# Altium PCB vert.PcbDoc (part 1 of 2)
Units mm, origin at the board's own origin, x right, y up, seen from the top; angles counter-clockwise.
Board outline 145 x 85 mm, 2 copper layers (Top Layer, Bottom Layer); 219 components, 187 nets, 800 pads, 113 vias.
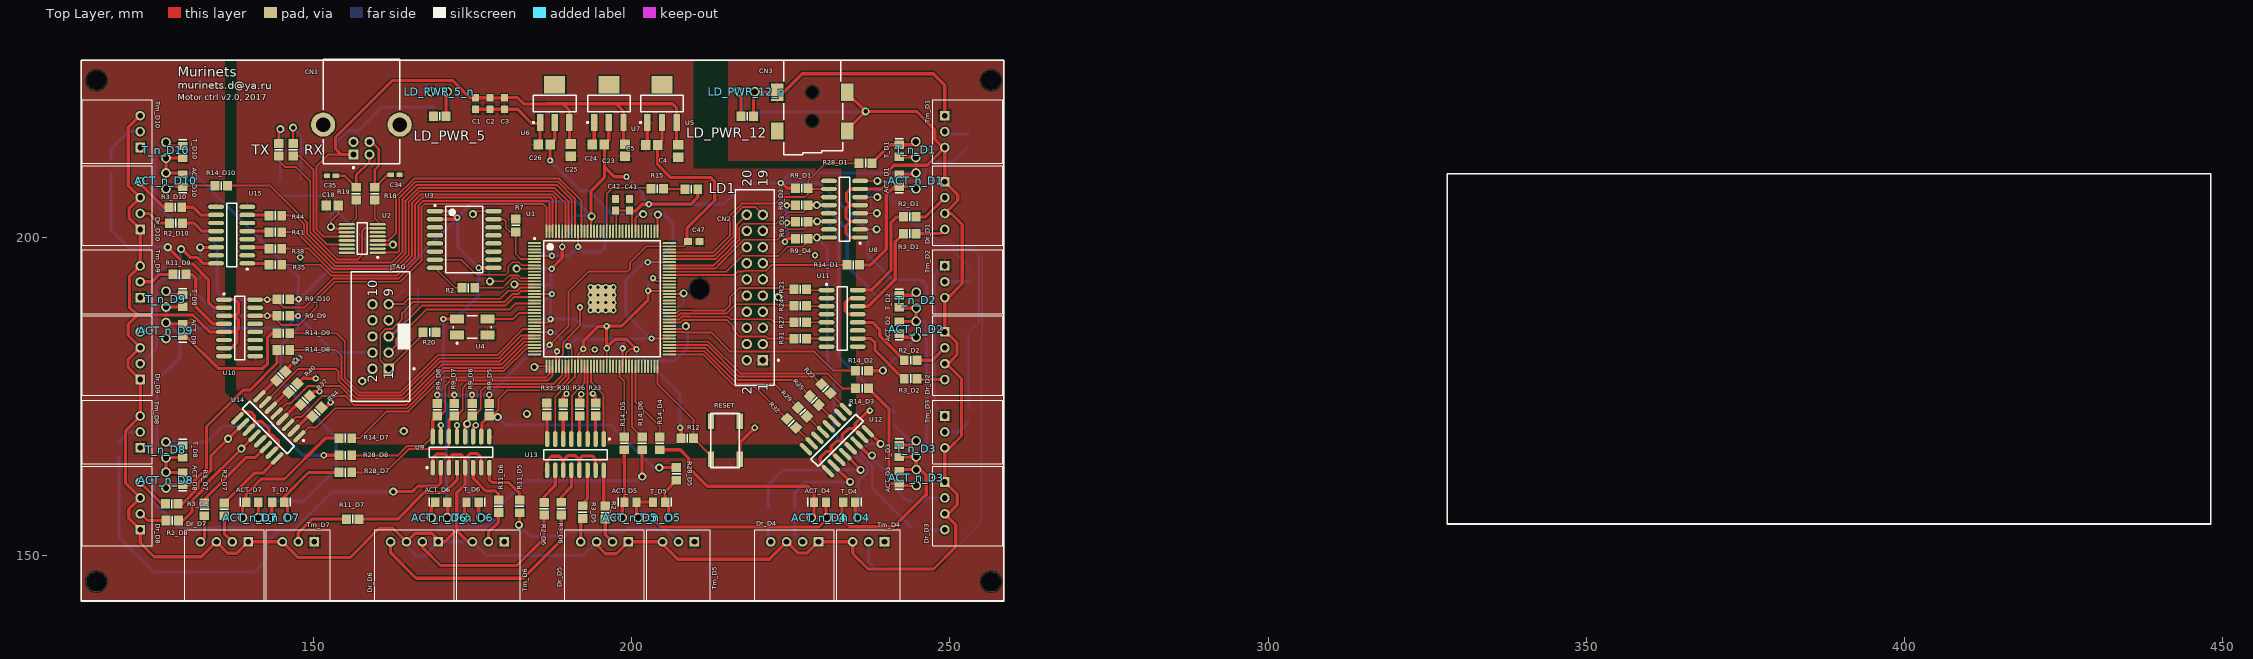
[diagram p0: Top Layer view]
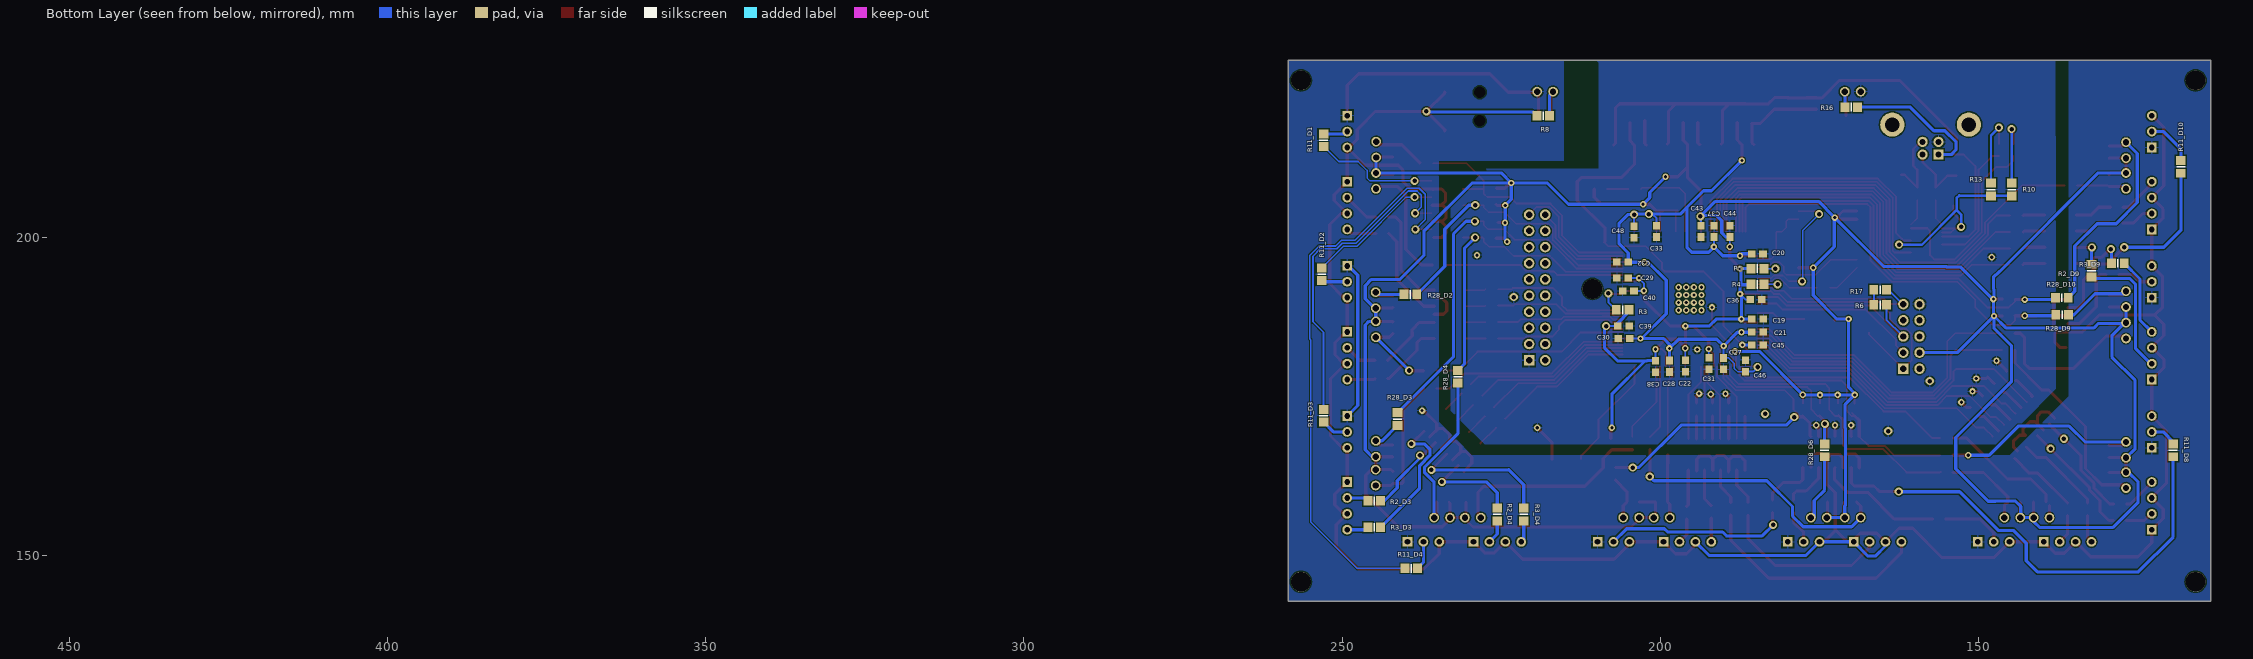
[diagram p1: Bottom Layer view, seen from below]

## Layer stack, top to bottom
Top Solder: solder mask 0.0102, Solder Resist, Dk 3.5
Top Layer: signal copper 0.0356
Dielectric 1: dielectric 0.32, FR-4, Dk 4.8
Bottom Layer: signal copper 0.0356
Bottom Solder: solder mask 0.0102, Solder Resist, Dk 3.5

## Board outline
113.475,142.9 113.475,227.9 258.475,227.9 258.475,142.9

## Design rules (kind name [scope] priority, off if disabled: settings)
Clearance [All] p1: gap=0.2 ignorepadtopadclearanceinfootprint=FALSE
DiffPairsRouting [All] p1: maxlimit=0.254 minlimit=0.254 mostfreqgap=0.254 toplayer_minwidth=0.3 toplayer_maxwidth=0.381 toplayer_prefwidth=0.381 bottomlayer_minwidth=0.3 bottomlayer_maxwidth=0.381 bottomlayer_prefwidth=0.381 maxuncoupledlength=12.7
PolygonConnect [All] p1: connectstyle=Relief reliefconductorwidth=0.254 reliefentries=4 polygonreliefangle="90 Angle" airgapwidth=0.254
RoutingVias [All] p1: holewidth=0.5 width=1 viastyle="Through Hole" minholewidth=0.5 minwidth=1 maxholewidth=0.5 maxwidth=1
SilkToSolderMaskClearance [IsPad] p1: minsilkscreentomaskgap=0 clearancetoexposedcopper=TRUE
SolderMaskExpansion [All] p1: expansion=0.102
UnRoutedNet [All] p1: checkbadconnections=TRUE
Width [All] p1: maxlimit=1 minlimit=0.2 preferedwidth=0.25 minimp=50.000000 maximp=50.000000 favimp=50.000000
27 further rules are at their usual default settings.

## Classes and differential pairs
net class step_[1..12]: step_1 step_2 step_3 step_4 step_5 step_6 step_7 step_8 step_9 step_10 step_11 step_12
net class dir_[1..12]: dir_1 dir_2 dir_3 dir_4 dir_5 dir_6 dir_7 dir_8 dir_9 dir_10 dir_12
net class term_L[1..12]: term_L1 term_L2 term_L3 term_L4 term_L5 term_L6 term_L7 term_L8 term_L9 term_L10 term_L11 term_L12
net class term_H[1..12]: term_H1 term_H2 term_H3 term_H4 term_H5 term_H6 term_H7 term_H8 term_H9 term_H10 term_H11 term_H12
net class led_dr[1..12]: LED_DR1 LED_DR2 LED_DR3 LED_DR4 LED_DR5 LED_DR6 LED_DR7 LED_DR8 LED_DR9 LED_DR10 led_dr11 led_dr12
net class DIR_H[1..12]: DIR_H1 DIR_H2 DIR_H3 DIR_H4 DIR_H5 DIR_H6 DIR_H7 DIR_H8 DIR_H9 DIR_H10
net class STEP_H[1..12]: STEP_H1 STEP_H2 STEP_H3 STEP_H4 STEP_H5 STEP_H6 STEP_H7 STEP_H8 STEP_H9 STEP_H10
channel class step-dir-single: D1 D2 D3 D4 D5 D6 D7 D8 D9 D10 D11 D12
differential pair USBD: +USBD_P -USBD_N

## Components (designator, comment, footprint, x,y, rotation, side; value= is the part's Value field where it differs from the comment)
ACT_D1 "led" CD2012-0805 242.05,208.975 r270 top (schematic designator ACT)
ACT_D2 "led" CD2012-0805 242.05,185.85 r270 top (schematic designator ACT)
ACT_D3 "led" CD2012-0805 242.05,162.325 r270 top (schematic designator ACT)
ACT_D4 "led" CD2012-0805 229.6,158.45 r180 top (schematic designator ACT)
ACT_D5 "led" CD2012-0805 199.8,158.45 r180 top (schematic designator ACT)
ACT_D6 "led" CD2012-0805 170.075,158.45 r180 top (schematic designator ACT)
ACT_D7 "led" CD2012-0805 140.35,158.45 r180 top (schematic designator ACT)
ACT_D8 "led" CD2012-0805 129.45,162.125 r270 top (schematic designator ACT)
ACT_D9 "led" CD2012-0805 129.45,185.5 r270 top (schematic designator ACT)
ACT_D10 "led" CD2012-0805 129.45,208.975 r270 top (schematic designator ACT)
ACT_n_D1 "led" led-pins 244.725,208.625 r270 top (schematic designator ACT_n)
ACT_n_D2 "led" led-pins 244.75,185.3 r270 top (schematic designator ACT_n)
ACT_n_D3 "led" led-pins 244.775,162 r270 top (schematic designator ACT_n)
ACT_n_D4 "led" led-pins 229.15,155.95 r180 top (schematic designator ACT_n)
ACT_n_D5 "led" led-pins 199.45,155.95 r180 top (schematic designator ACT_n)
ACT_n_D6 "led" led-pins 169.45,155.95 r180 top (schematic designator ACT_n)
ACT_n_D7 "led" led-pins 139.775,155.95 r180 top (schematic designator ACT_n)
ACT_n_D8 "led" led-pins 126.85,161.6 r270 top (schematic designator ACT_n)
ACT_n_D9 "led" led-pins 126.85,185.1 r270 top (schematic designator ACT_n)
ACT_n_D10 "led" led-pins 126.85,208.625 r270 top (schematic designator ACT_n)
C1 "Cap" CAPC1608M 175.475,221.075 r270 top value=10nF
C2 "Cap" CAPC1608M 177.725,221.075 r270 top value=100nF
C3 "Cap" CAPC1608M 179.975,221.075 r270 top value=4.7uF
C4 "Cap" CAPC2012M 207.3,213.625 r270 top value=10uF
C5 "Cap" CAPC2012M 203.125,214.55 r180 top value=10uF
C18 "Cap" CAPC2012M 152.95,205.05 r180 top value=100nF
C19 "Cap" CAPC1608M 184.7,187.2 r0 bottom value=100nF
C20 "Cap" CAPC1608M 184.75,197.475 r180 bottom value=100nF
C21 "Cap" CAPC1608M 184.725,185.15 r180 bottom value=100nF
C22 "Cap" CAPC1608M 196.075,179.85 r90 bottom value=100nF
C23 "Cap" CAPC2012M 198.95,213.75 r270 top value=10uF
C24 "Cap" CAPC2012M 194.75,214.625 r180 top value=10uF
C25 "Cap" CAPC2012M 190.425,213.775 r270 top value=10uF
C26 "Cap" CAPC2012M 186.225,214.625 r180 top value=10uF
C27 "Cap" CAPC1608M 190.05,180.2 r270 bottom value=100nF
C28 "Cap" CAPC1608M 198.575,179.8 r270 bottom value=100nF
C29 "Cap" CAPC1608M 205.925,193.65 r180 bottom value=100nF
C30 "Cap" CAPC1608M 205.725,184.175 r0 bottom value=100nF
C31 "Cap" CAPC1608M 192.325,180.225 r90 bottom value=100nF
C32 "Cap" CAPC1608M 205.925,196.15 r0 bottom value=100nF
C33 "Cap" CAPC1608M 200.575,201 r270 bottom value=100nF
C34 "Cap" CAPC1005M 162.8,209.875 r180 top value=47pF
C35 "Cap" CAPC1005M 152.8,209.725 r0 top value=47pF
C36 "Cap" CAPC1608M 184.95,190.25 r0 bottom value=100nF
C37 "Cap" CAPC1608M 191.575,201 r90 bottom value=100nF
C38 "Cap" CAPC1608M 200.75,179.775 r90 bottom value=100nF
C39 "Cap" CAPC1608M 205.8,186.125 r0 bottom value=100nF
C40 "Cap" CAPC1608M 205.025,191.65 r180 bottom value=100nF
C41 "Cap" CAPC1608M 199.625,205.175 r270 top value=100nF
C42 "Cap" CAPC1608M 197.425,205.175 r270 top value=100nF
C43 "Cap" CAPC1608M 193.575,201 r90 bottom value=100nF
C44 "Cap" CAPC1608M 189.075,201 r270 bottom value=100nF
C45 "Cap" CAPC1608M 184.725,183.15 r0 bottom value=100nF
C46 "Cap" CAPC1608M 186.6,179.85 r270 bottom value=100nF
C47 "Cap" CAPC1608M 209.75,199.375 r180 top value=100nF
C48 "Cap" CAPC1608M 204.1,200.9 r90 bottom value=100nF
CN1 "Conn" USB2.5-2H4D 157.52,214.065 r90 top
CN2 "idc-20" IDC2.54-V20C 219.35,192.175 r90 top
CN3 "conn_4_2.54" SCKT/SM4.5-2H4 228.375,222.85 r270 top
Dr_D1 "4-pin" CWF-4R 249.2,208.8 r270 top (schematic designator Dr)
Dr_D2 "4-pin" CWF-4R 249.2,185.2 r270 top (schematic designator Dr)
Dr_D3 "4-pin" CWF-4R 249.2,161.6 r270 top (schematic designator Dr)
Dr_D4 "4-pin" CWF-4R 229.35,152.2 r180 top (schematic designator Dr)
Dr_D5 "4-pin" CWF-4R 199.475,152.2 r180 top (schematic designator Dr)
Dr_D6 "4-pin" CWF-4R 169.6,152.2 r180 top (schematic designator Dr)
Dr_D7 "4-pin" CWF-4R 139.725,152.2 r180 top (schematic designator Dr)
Dr_D8 "4-pin" CWF-4R 122.75,154.1 r90 top (schematic designator Dr)
Dr_D9 "4-pin" CWF-4R 122.75,177.7 r90 top (schematic designator Dr)
Dr_D10 "4-pin" CWF-4R 122.75,201.3 r90 top (schematic designator Dr)
JTAG "IDC-10MS" IDC2.54-V10D 160.525,184.475 r90 top
LD1 "chip led" RESC2012M 209.375,207.625 r180 top
LD_PWR_5 "led" RESC2012M 169.825,219.1 r180 top
LD_PWR_5_n "led" led-pins 169.45,222.9 r180 top
LD_PWR_12 "led" RESC2012M 218.15,219.1 r0 top
LD_PWR_12_n "led" led-pins 218.4,223 r0 top
R2 "25" RESC2012M 174.325,192.1 r180 top value=1K
R2_D1 "1K" RESC2012M 243.7,203.275 r0 top (schematic designator R2)
R2_D2 "1K" RESC2012M 243.825,180.75 r0 top (schematic designator R2)
R2_D3 "1K" RESC2012M 244.95,158.625 r0 bottom (schematic designator R2)
R2_D4 "1K" RESC2012M 225.625,156.5 r270 bottom (schematic designator R2)
R2_D5 "1K" RESC2012M 195.85,156.8 r270 top (schematic designator R2)
R2_D6 "1K" RESC2012M 186.225,157.4 r270 top (schematic designator R2)
R2_D7 "1K" RESC2012M 135.975,157.3 r270 top (schematic designator R2)
R2_D8 "1K" RESC2012M 127.8,155.55 r180 top (schematic designator R2)
R2_D9 "1K" RESC2012M 132.225,194.825 r270 bottom (schematic designator R2)
R2_D10 "1K" RESC2012M 128.375,202.3 r180 top (schematic designator R2)
R3 "10K" RESC2012M 205.925,188.65 r0 bottom value=1K
R3_D1 "1K" RESC2012M 243.7,200.65 r0 top (schematic designator R3)
R3_D2 "1K" RESC2012M 243.825,177.85 r0 top (schematic designator R3)
R3_D3 "1K" RESC2012M 244.95,154.475 r0 bottom (schematic designator R3)
R3_D4 "1K" RESC2012M 221.45,156.5 r270 bottom (schematic designator R3)
R3_D5 "1K" RESC2012M 192.275,156.875 r270 top (schematic designator R3)
R3_D6 "1K" RESC2012M 188.925,157.425 r270 top (schematic designator R3)
R3_D7 "1K" RESC2012M 132.85,157.3 r270 top (schematic designator R3)
R3_D8 "1K" RESC2012M 127.7,158.15 r180 top (schematic designator R3)
R3_D9 "1K" RESC2012M 128.075,195.975 r180 bottom (schematic designator R3)
R3_D10 "1K" RESC2012M 128.275,204.775 r180 top (schematic designator R3)
R4 "10K" RESC2012M 184.725,192.65 r180 bottom value=1K
R5 "10K" RESC2012M 184.725,195.15 r180 bottom value=1K
R6 "10K" RESC2012M 165.45,189.425 r0 bottom value=1K
R7 "Res2" RESC2012M 181.775,201.925 r270 top value=10K
R8 "Res2" RESC2012M 218.4,219.15 r0 bottom value=1K
R9_D1 "1K" RESC2012M 226.725,207.775 r0 top (schematic designator R9)
R9_D2 "1K" RESC2012M 226.725,205.133 r0 top (schematic designator R9)
R9_D3 "1K" RESC2012M 226.725,202.492 r0 top (schematic designator R9)
R9_D4 "1K" RESC2012M 226.725,199.85 r0 top (schematic designator R9)
R9_D5 "1K" RESC2012M 177.6,172.95 r270 top (schematic designator R9)
R9_D6 "1K" RESC2012M 174.925,172.95 r270 top (schematic designator R9)
R9_D7 "1K" RESC2012M 172.075,172.95 r270 top (schematic designator R9)
R9_D8 "1K" RESC2012M 169.45,172.95 r270 top (schematic designator R9)
R9_D9 "1K" RESC2012M 145.25,187.7 r180 top (schematic designator R9)
R9_D10 "1K" RESC2012M 145.25,190.35 r180 top (schematic designator R9)
R10 "Res2" RESC2012M 144.77,207.565 r90 bottom value=1K
R11_D1 "1K" RESC2012M 252.925,215.3 r90 bottom (schematic designator R11)
R11_D2 "1K" RESC2012M 253.2,194.25 r270 bottom (schematic designator R11)
R11_D3 "1K" RESC2012M 252.925,172.025 r270 bottom (schematic designator R11)
R11_D4 "1K" RESC2012M 239.15,148.025 r180 bottom (schematic designator R11)
R11_D5 "1K" RESC2012M 182.375,157.775 r270 top (schematic designator R11)
R11_D6 "1K" RESC2012M 179.075,157.8 r270 top (schematic designator R11)
R11_D7 "1K" RESC2012M 156.15,155.775 r180 top (schematic designator R11)
R11_D8 "1K" RESC2012M 119.4,166.575 r90 bottom (schematic designator R11)
R11_D9 "1K" RESC2012M 128.925,194.225 r180 top (schematic designator R11)
R11_D10 "1K" RESC2012M 118.175,211.125 r90 bottom (schematic designator R11)
R12 "Res2" RESC2012M 208.725,168.475 r180 top value=10K
R13 "Res2" RESC2012M 148.02,207.565 r90 bottom value=1K
R14_D1 "Res2" RESC2012M 234.825,195.725 r0 top value=1K (schematic designator R14)
R14_D2 "Res2" RESC2012M 236.2,179.1 r0 top value=1K (schematic designator R14)
R14_D3 "Res2" RESC2012M 236.2,176.325 r0 top value=1K (schematic designator R14)
R14_D4 "Res2" RESC2012M 204.4,167.675 r270 top value=1K (schematic designator R14)
R14_D5 "Res2" RESC2012M 198.825,167.675 r270 top value=1K (schematic designator R14)
R14_D6 "Res2" RESC2012M 201.625,167.675 r270 top value=1K (schematic designator R14)
R14_D7 "Res2" RESC2012M 155,168.5 r180 top value=1K (schematic designator R14)
R14_D8 "Res2" RESC2012M 145.25,182.35 r180 top value=1K (schematic designator R14)
R14_D9 "Res2" RESC2012M 145.25,184.975 r180 top value=1K (schematic designator R14)
R14_D10 "Res2" RESC2012M 135.475,208.175 r180 top value=1K (schematic designator R14)
R15 "Res2" RESC2012M 204,207.675 r0 top value=270
R16 "Res2" RESC2012M 169.975,220.525 r180 bottom value=1K
R17 "1K" RESC2012M 165.45,191.8 r0 bottom
R18 "Res" RESC2012M 159.625,206.925 r90 top value=27
R19 "Res" RESC2012M 156.675,206.925 r90 top value=27
R20 "1K" RESC2012M 168.225,185.125 r0 top
R21 "Res2" RESC2012M 226.475,191.9 r0 top value=1K
R22 "Res2" RESC2012M 230.507,176.256 r315 top value=1K
R23 "Res2" RESC2012M 194.325,173 r270 top value=1K
R24 "Res2" RESC2012M 226.475,189.317 r0 top value=1K
R25 "Res2" RESC2012M 228.686,174.436 r315 top value=1K
R26 "Res2" RESC2012M 191.8,173 r270 top value=1K
R27 "Res2" RESC2012M 226.475,186.733 r0 top value=1K
R28_D1 "Res2" RESC2012M 236.75,211.725 r0 top value=1K (schematic designator R28)
R28_D2 "Res2" RESC2012M 239.275,191.075 r0 bottom value=1K (schematic designator R28)
R28_D3 "Res2" RESC2012M 241.3,171.5 r270 bottom value=1K (schematic designator R28)
R28_D4 "Res2" RESC2012M 231.8,178.15 r270 bottom value=1K (schematic designator R28)
R28_D5 "Res2" RESC2012M 207.025,162.875 r270 top value=1K (schematic designator R28)
R28_D6 "Res2" RESC2012M 174.175,166.575 r270 bottom value=1K (schematic designator R28)
R28_D7 "Res2" RESC2012M 155,163.1 r180 top value=1K (schematic designator R28)
R28_D8 "Res2" RESC2012M 155,165.8 r180 top value=1K (schematic designator R28)
R28_D9 "Res2" RESC2012M 136.85,187.875 r180 bottom value=1K (schematic designator R28)
R28_D10 "Res2" RESC2012M 136.875,190.55 r180 bottom value=1K (schematic designator R28)
R29 "Res2" RESC2012M 226.865,172.615 r315 top value=1K
R30 "Res2" RESC2012M 189.25,173 r270 top value=1K
R31 "Res2" RESC2012M 226.475,184.15 r0 top value=1K
R32 "Res2" RESC2012M 225.097,170.847 r315 top value=1K
R33 "Res2" RESC2012M 186.675,173 r270 top value=1K
R34 "Res2" RESC2012M 150.55,172.591 r225 top value=1K
R35 "Res2" RESC2012M 144,195.75 r180 top value=1K
R37 "Res2" RESC2012M 148.694,174.447 r225 top value=1K
R38 "Res2" RESC2012M 144,198.275 r180 top value=1K
R40 "Res2" RESC2012M 146.785,176.357 r225 top value=1K
R41 "Res2" RESC2012M 144,200.875 r180 top value=1K
R43 "Res2" RESC2012M 144.858,178.283 r225 top value=1K
R44 "Res2" RESC2012M 144,203.475 r180 top value=1K
RESET "LTL6" "BUTTON - LTL6" 216.925,172.375 r180 top
RX "led" RESC2012M 146.77,213.815 r90 top
T_D1 "led" CD2012-0805 242.05,213.65 r90 top (schematic designator T)
T_D2 "led" CD2012-0805 242.05,190 r90 top (schematic designator T)
T_D3 "led" CD2012-0805 242.05,166.475 r90 top (schematic designator T)
T_D4 "led" CD2012-0805 234.175,158.45 r0 top (schematic designator T)
T_D5 "led" CD2012-0805 204.3,158.45 r0 top (schematic designator T)
T_D6 "led" CD2012-0805 175,158.45 r0 top (schematic designator T)
T_D7 "led" CD2012-0805 144.45,158.45 r0 top (schematic designator T)
T_D8 "led" CD2012-0805 129.45,166.4 r90 top (schematic designator T)
T_D9 "led" CD2012-0805 129.45,190.075 r90 top (schematic designator T)
T_D10 "led" CD2012-0805 129.45,213.475 r90 top (schematic designator T)
T_n_D1 "led" led-pins 244.6,214.15 r90 top (schematic designator T_n)
T_n_D2 "led" led-pins 244.675,190.475 r90 top (schematic designator T_n)
T_n_D3 "led" led-pins 244.65,167.125 r90 top (schematic designator T_n)
T_n_D4 "led" led-pins 234.6,156.05 r0 top (schematic designator T_n)
T_n_D5 "led" led-pins 204.875,156.05 r0 top (schematic designator T_n)
T_n_D6 "led" led-pins 175.375,156.05 r0 top (schematic designator T_n)
T_n_D7 "led" led-pins 144.975,156.05 r0 top (schematic designator T_n)
T_n_D8 "led" led-pins 126.75,166.95 r90 top (schematic designator T_n)
T_n_D9 "led" led-pins 126.75,190.65 r90 top (schematic designator T_n)
T_n_D10 "led" led-pins 126.75,214.05 r90 top (schematic designator T_n)
Tm_D1 "3-pin" CWF-3R 249.2,219.175 r270 top (schematic designator Tm)
Tm_D2 "3-pin" CWF-3R 249.2,195.575 r270 top (schematic designator Tm)
Tm_D3 "3-pin" CWF-3R 249.2,171.975 r270 top (schematic designator Tm)
Tm_D4 "3-pin" CWF-3R 239.725,152.2 r180 top (schematic designator Tm)
Tm_D5 "3-pin" CWF-3R 209.85,152.2 r180 top (schematic designator Tm)
Tm_D6 "3-pin" CWF-3R 179.975,152.2 r180 top (schematic designator Tm)
Tm_D7 "3-pin" CWF-3R 150.1,152.2 r180 top (schematic designator Tm)
Tm_D8 "3-pin" CWF-3R 122.75,166.975 r90 top (schematic designator Tm)
Tm_D9 "3-pin" CWF-3R 122.75,190.575 r90 top (schematic designator Tm)
Tm_D10 "3-pin" CWF-3R 122.75,214.175 r90 top (schematic designator Tm)
TX "led" RESC2012M 144.52,213.815 r90 top
U1 "EP4CE6E22C8" EQFP144_M 195.325,190.4 r0 top
U2 "COM-USB-FT230XS-IL16" SSOP-16_M 157.65,199.875 r180 top
U3 "EPCS64SI16N" SOIC16_M 173.675,199.725 r0 top
U4 "3H53-ET" 2SMX-3SMXB 174.925,185.95 r0 top
U5 "LD1117" SOT223-4M 204.75,221.075 r90 top
U6 "LD1117" SOT223-4M 187.9,221.075 r90 top
U7 "LD1117" SOT223-4M 196.4,221.075 r90 top
U8 "ACPL-247" SOIC127P600-16M 233.45,204.475 r180 top
U9 "ACPL-247" SOIC127P600-16M 173.175,166.3 r90 top
U10 "ACPL-247" SOIC127P600-16M 138.375,185.825 r0 top
U11 "ACPL-247" SOIC127P600-16M 233.075,187.325 r0 top
U12 "ACPL-247" SOIC127P600-16M 232.257,168.178 r315 top
U13 "ACPL-247" SOIC127P600-16M 191.15,165.9 r270 top
U14 "ACPL-247" SOIC127P600-16M 142.899,170.183 r225 top
U15 "ACPL-247" SOIC127P600-16M 137.125,200.4 r180 top

## Footprints (in the part's own frame and the unit in brackets; to place one, negate y for a bottom-side part, rotate by r counter-clockwise, add the part's x,y. Pads: shape width x height; smd on the part's side, far side on the other; paste and mask are expansions set on the pad)
2SMX-3SMXB [mm] "Quartz Crystal, SM; Body 6.0 x 3.5 mm (LxW)"
  rect 2.2x1.4 smd: 1(-2.4,-1.25) 2(2.4,-1.25) 3(2.4,1.25) 4(-2.4,1.25)
  silkscreen extent -3,-2.66 3,1.75
"BUTTON - LTL6" [mm]
  rect 1x2.45 smd: 1(-0.075,7.225) 2(-0.05,1.225) 3(4.475,7.2) 4(4.475,1.225)
  silkscreen extent 0,0 4.5,8.5, body extent -0.7,-0.13 5.13,8.62, height 5
CAPC1005M [mm] "Chip Capacitor, Body 1.0x0.5mm, IPC Low Density"
  rect 1x0.7 smd: 1(-0.7,0) 2(0.7,0)
  body extent -0.55,-0.3 0.55,0.3, height 0.6
CAPC1608M [mm] "Chip Capacitor, Body 1.6x0.8mm, IPC Low Density"
  rect 1.2x1.1 smd: 1(-0.9,0) 2(0.9,0)
  body extent -0.87,-0.48 0.87,0.48, height 0.85
CAPC2012M [mm] "Chip Capacitor, Body 2.0x1.3mm, IPC Low Density"
  rect 1.5x1.6 smd: 1(-0.95,0) 2(0.95,0)
  body extent -1.1,-0.72 1.1,0.72, height 1.1
CD2012-0805 [mm] "Chip Diode; Body 2.0 x 1.3 mm (LxW typ)"
  rect 1.3x1.5 smd: 1(-0.95,0) 2(0.95,0)
  silkscreen extent 1.9,-0.65 1.9,0.65
CWF-3R [mil] "CWF-3R (DS1069-3 MR-A)"
  rect 60x60 hole 36: 1(0,0)
  round 60 hole 36: 2(98.43,0) 3(196.85,0)
  silkscreen extent -98,-75 295,360, body extent -98,-75 295,360, height 226
CWF-4R [mil] "CWF-4R (DS1069-4 MR-A)"
  rect 60x60 hole 36: 1(0,0)
  round 60 hole 36: 2(98.43,0) 3(196.85,0) 4(295.28,0)
  silkscreen extent -98,-75 394,360, body extent -98,-75 394,360, height 226
EQFP144_M [mm] "Thin QFP, 144-Leads, Body 20x20mm, Pitch 0.5mm, IPC Low Density"
  oval 2.1x0.3 smd: 1(-10.6,8.75) 2(-10.6,8.25) 3(-10.6,7.75) 4(-10.6,7.25) 5(-10.6,6.75) 6(-10.6,6.25) 7(-10.6,5.75) 8(-10.6,5.25) 9(-10.6,4.75) 10(-10.6,4.25) 11(-10.6,3.75) 12(-10.6,3.25) 13(-10.6,2.75) 14(-10.6,2.25) 15(-10.6,1.75) 16(-10.6,1.25) 17(-10.6,0.75) 18(-10.6,0.25) 19(-10.6,-0.25) 20(-10.6,-0.75) 21(-10.6,-1.25) 22(-10.6,-1.75) 23(-10.6,-2.25) 24(-10.6,-2.75) 25(-10.6,-3.25) 26(-10.6,-3.75) 27(-10.6,-4.25) 28(-10.6,-4.75) 29(-10.6,-5.25) 30(-10.6,-5.75) 31(-10.6,-6.25) 32(-10.6,-6.75) 33(-10.6,-7.25) 34(-10.6,-7.75) 35(-10.6,-8.25) 36(-10.6,-8.75) 73(10.6,-8.75) 74(10.6,-8.25) 75(10.6,-7.75) 76(10.6,-7.25) 77(10.6,-6.75) 78(10.6,-6.25) 79(10.6,-5.75) 80(10.6,-5.25) 81(10.6,-4.75) 82(10.6,-4.25) 83(10.6,-3.75) 84(10.6,-3.25) 85(10.6,-2.75) 86(10.6,-2.25) 87(10.6,-1.75) 88(10.6,-1.25) 89(10.6,-0.75) 90(10.6,-0.25) 91(10.6,0.25) 92(10.6,0.75) 93(10.6,1.25) 94(10.6,1.75) 95(10.6,2.25) 96(10.6,2.75) 97(10.6,3.25) 98(10.6,3.75) 99(10.6,4.25) 100(10.6,4.75) 101(10.6,5.25) 102(10.6,5.75) 103(10.6,6.25) 104(10.6,6.75) 105(10.6,7.25) 106(10.6,7.75) 107(10.6,8.25) 108(10.6,8.75)
  oval 0.3x2.1 smd: 37(-8.75,-10.6) 38(-8.25,-10.6) 39(-7.75,-10.6) 40(-7.25,-10.6) 41(-6.75,-10.6) 42(-6.25,-10.6) 43(-5.75,-10.6) 44(-5.25,-10.6) 45(-4.75,-10.6) 46(-4.25,-10.6) 47(-3.75,-10.6) 48(-3.25,-10.6) 49(-2.75,-10.6) 50(-2.25,-10.6) 51(-1.75,-10.6) 52(-1.25,-10.6) 53(-0.75,-10.6) 54(-0.25,-10.6) 55(0.25,-10.6) 56(0.75,-10.6) 57(1.25,-10.6) 58(1.75,-10.6) 59(2.25,-10.6) 60(2.75,-10.6) 61(3.25,-10.6) 62(3.75,-10.6) 63(4.25,-10.6) 64(4.75,-10.6) 65(5.25,-10.6) 66(5.75,-10.6) 67(6.25,-10.6) 68(6.75,-10.6) 69(7.25,-10.6) 70(7.75,-10.6) 71(8.25,-10.6) 72(8.75,-10.6) 109(8.75,10.6) 110(8.25,10.6) 111(7.75,10.6) 112(7.25,10.6) 113(6.75,10.6) 114(6.25,10.6) 115(5.75,10.6) 116(5.25,10.6) 117(4.75,10.6) 118(4.25,10.6) 119(3.75,10.6) 120(3.25,10.6) 121(2.75,10.6) 122(2.25,10.6) 123(1.75,10.6) 124(1.25,10.6) 125(0.75,10.6) 126(0.25,10.6) 127(-0.25,10.6) 128(-0.75,10.6) 129(-1.25,10.6) 130(-1.75,10.6) 131(-2.25,10.6) 132(-2.75,10.6) 133(-3.25,10.6) 134(-3.75,10.6) 135(-4.25,10.6) 136(-4.75,10.6) 137(-5.25,10.6) 138(-5.75,10.6) 139(-6.25,10.6) 140(-6.75,10.6) 141(-7.25,10.6) 142(-7.75,10.6) 143(-8.25,10.6) 144(-8.75,10.6)
  rect 4.3x4.3 smd: 145(0,0)
  silkscreen extent -10.72,-9.15 9.15,9.57, body extent -10,-10 10,10, height 1.6
IDC2.54-V10D [mm] "Connector; IDC, Low Profile Male Header, Thru-Hole; 10 Position; Vertical; Pitch 2.54 mm; Body 20.32 x 9.2 x 9.45 mm (LxWxH)"
  rect 1.65x1.65 hole 1: 1(-5.08,-1.27)
  round 1.65 hole 1: 2(-5.08,1.27) 3(-2.54,-1.27) 4(-2.54,1.27) 5(0,-1.27) 6(0,1.27) 7(2.54,-1.27) 8(2.54,1.27) 9(5.08,-1.27) 10(5.08,1.27)
  silkscreen extent -10.16,-5.38 10.16,4.6, body extent -10.16,-4.6 10.16,4.6, height 9.45
IDC2.54-V20C [mm] "Connector; IDC, PCB Transition - 2 Rows, Thru-Hole; 20 Position; Vertical; Pitch 2.54 mm; Body 30.74 x 6.1 x 7.45 mm (LxWxH), Kinked Contacts"
  rect 1.65x1.65 hole 1: 1(-11.43,-1.27)
  round 1.65 hole 1: 2(-11.43,1.27) 3(-8.89,-1.27) 4(-8.89,1.27) 5(-6.35,-1.27) 6(-6.35,1.27) 7(-3.81,-1.27) 8(-3.81,1.27) 9(-1.27,-1.27) 10(-1.27,1.27) 11(1.27,-1.27) 12(1.27,1.27) 13(3.81,-1.27) 14(3.81,1.27) 15(6.35,-1.27) 16(6.35,1.27) 17(8.89,-1.27) 18(8.89,1.27) 19(11.43,-1.27) 20(11.43,1.27)
  silkscreen extent -15.37,-3.83 15.37,3.05, body extent -15.37,-3.05 15.37,3.05, height 7.45
led-pins [mm]
  round 1.524 hole 1: 1(-1.55,-0.05) 2(0.95,-0.05)
RESC2012M [mm] "Chip Resistor, Body 2.0x1.3mm, IPC Low Density"
  rect 1.4x1.5 smd: 1(-1,0) 2(1,0)
  silkscreen extent 0,-0.65 0,0.65, body extent -1.07,-0.7 1.07,0.7, height 0.65
SCKT/SM4.5-2H4 [mm] "Connector; Low Power Socket, SM, Right Angle, Body 14.8 x 9 x 11 mm (LxWxH)"
  rect 2.7x2 smd: 1(0,-5.5) 2(6.1,-5.5) 3(6.1,5.5) 4(0,5.5)
  round 1.5 hole 1.8: MH1(0,0) MH2(4.5,0)
  silkscreen extent -5,-4.5 9.8,4.8, body extent -5,-4.5 9.8,4.8, height 11
SOIC16_M [mm] "SOIC, 16-Leads, Body 10.3x7.5mm, Pitch 1.27mm, IPC Low Density"
  oval 2.6x0.7 smd: 1(-4.6,4.445) 2(-4.6,3.175) 3(-4.6,1.905) 4(-4.6,0.635) 5(-4.6,-0.635) 6(-4.6,-1.905) 7(-4.6,-3.175) 8(-4.6,-4.445) 9(4.6,-4.445) 10(4.6,-3.175) 11(4.6,-1.905) 12(4.6,-0.635) 13(4.6,0.635) 14(4.6,1.905) 15(4.6,3.175) 16(4.6,4.445)
  silkscreen extent -4.72,-5.25 2.9,5.47, body extent -3.75,-5.25 3.75,5.25, height 2.65
SOIC127P600-16M [mm] "SOIC, 16-Leads, Body 9.9x3.9mm, Pitch 1.27mm, IPC Low Density"
  oval 2.5x0.7 smd: 1(-2.45,4.445) 2(-2.45,3.175) 3(-2.45,1.905) 4(-2.45,0.635) 5(-2.45,-0.635) 6(-2.45,-1.905) 7(-2.45,-3.175) 8(-2.45,-4.445) 9(2.45,-4.445) 10(2.45,-3.175) 11(2.45,-1.905) 12(2.45,-0.635) 13(2.45,0.635) 14(2.45,1.905) 15(2.45,3.175) 16(2.45,4.445)
  silkscreen extent -2.58,-5 0.8,5.47, body extent -2,-5 2,5, height 1.75
SOT223-4M [mm] "SOT223, 4-Leads, Body 6.5x3.5mm, Pitch 2.3mm, Lead Span 7mm, IPC Low Density"
  rect 2.7x1 smd: 1(-2.95,2.3) 2(-2.95,0) 3(-2.95,-2.3)
  rect 2.7x3.3 smd: 4(2.95,0)
  silkscreen extent -3.07,-3.35 1.3,3.47, body extent -1.85,-3.35 1.85,3.35, height 1.8
SSOP-16_M [mm] "SOP, 16-Leads, Body 4.9x3.9mm, Pitch 0.635mm, IPC Low Density"
  oval 2.55x0.4 smd: 1(-2.425,2.223) 2(-2.425,1.588) 3(-2.425,0.953) 4(-2.425,0.318) 5(-2.425,-0.317) 6(-2.425,-0.952) 7(-2.425,-1.587) 8(-2.425,-2.222) 9(2.425,-2.222) 10(2.425,-1.587) 11(2.425,-0.952) 12(2.425,-0.317) 13(2.425,0.318) 14(2.425,0.953) 15(2.425,1.588) 16(2.425,2.223)
  silkscreen extent -2.55,-2.5 0.8,3.1, body extent -1.99,-2.5 1.99,2.5, height 1.76
USB2.5-2H4D [mm] "Connector; USB1.1, Type B, Thru-Hole; 4 Position; Right Angle"
  rect 1.6x1.6 hole 0.92: 1(-1,1.25)
  round 1.6 hole 0.92: 2(-1,-1.25) 3(1,-1.25) 4(1,1.25)
  round 3.8 hole 2.3: 5(3.71,6.02) 6(3.71,-6.02)
  silkscreen extent -3.18,-6.02 13.99,6.02, body extent -2.41,-6.02 13.99,6.02, height 11.1

## Part data
ACT_D1 ACT_D2 ACT_D3 ACT_D4 ACT_D5 ACT_D6 ACT_D7 ACT_D8 ACT_D9 ACT_D10 ACT_n_D1 ACT_n_D2 ACT_n_D3 ACT_n_D4 ACT_n_D5 ACT_n_D6 ACT_n_D7 ACT_n_D8 ACT_n_D9 ACT_n_D10 LD_PWR_5 LD_PWR_5_n LD_PWR_12 LD_PWR_12_n RX T_D1 T_D2 T_D3 T_D4 T_D5 T_D6 T_D7 T_D8 T_D9 T_D10 T_n_D1 T_n_D2 T_n_D3 T_n_D4 T_n_D5 T_n_D6 T_n_D7 T_n_D8 T_n_D9 T_n_D10 TX: library part "chip led", "chip led"
C1 C2 C3 C4 C5 C18 C19 C20 C21 C22 C23 C24 C25 C26 C27 C28 C29 C30 C31 C32 C33 C34 C35 C36 C37 C38 C39 C40 C41 C42 C43 C44 C45 C46 C47 C48: "Capacitor", LatestRevisionDate=17-Jul-2002, LatestRevisionNote="Re-released for DXP Platform.", PackageDescription="Radial Cap, Thru-Hole; 2 Leads; 0.3 in Pin Spacing", PackageReference=RAD-0.3, Published=8-Jun-2000, Publisher="Altium Limited"
CN1: library part USBB-1J, "USBB-1J", AC Magnitude=1, url=http://www.brownbear.ru/components/usbb-1j.html
JTAG: library part BH-10(IDC-10MS), "BH-10(IDC-10MS)"
R2 R2_D1 R2_D2 R2_D3 R2_D4 R2_D5 R2_D6 R2_D7 R2_D8 R2_D9 R2_D10 R3 R3_D1 R3_D2 R3_D3 R3_D4 R3_D5 R3_D6 R3_D7 R3_D8 R3_D9 R3_D10 R4 R5 R6 R9_D1 R9_D2 R9_D3 R9_D4 R9_D5 R9_D6 R9_D7 R9_D8 R9_D9 R9_D10 R11_D1 R11_D2 R11_D3 R11_D4 R11_D5 R11_D6 R11_D7 R11_D8 R11_D9 R11_D10 R17 R18 R19 R20: library part Res2, "Resistor", LatestRevisionDate=17-Jul-2002, LatestRevisionNote="Re-released for DXP Platform.", PackageDescription="Axial Device, Thru-Hole; 2 Leads; 0.4 in Pin Spacing", PackageReference=AXIAL-0.4, Published=8-Jun-2000, Publisher="Altium Limited"
R7 R8 R10 R12 R13 R14_D1 R14_D2 R14_D3 R14_D4 R14_D5 R14_D6 R14_D7 R14_D8 R14_D9 R14_D10 R15 R16 R21 R22 R23 R24 R25 R26 R27 R28_D1 R28_D2 R28_D3 R28_D4 R28_D5 R28_D6 R28_D7 R28_D8 R28_D9 R28_D10 R29 R30 R31 R32 R33 R34 R35 R37 R38 R40 R41 R43 R44: "Resistor", LatestRevisionDate=17-Jul-2002, LatestRevisionNote="Re-released for DXP Platform.", PackageDescription="Axial Device, Thru-Hole; 2 Leads; 0.4 in Pin Spacing", PackageReference=AXIAL-0.4, Published=8-Jun-2000, Publisher="Altium Limited"
RESET: library part "chip button LTL6"
U1: "Cyclone IV Family FPGA, 2V Core, 91 I/O Pins, 2 PLLs, 144-Pin QFP, Speed Grade 8, Commercial Grade", Supplier Part Number 1=EP4CE6E22C8-ND, Code_JEDEC=MS-026-BFB, ComponentLink1Description="Manufacturer Link", ComponentLink1URL=http://www.altera.com/, ComponentLink2Description=Handbook, ComponentLink2URL=http://www.altera.com/literature/hb/cyclone-iv/cyclone4-handbook.pdf, ComponentLink3Description="Pinout Specification", ComponentLink3URL=http://www.altera.com/literature/lit-dp.jsp?category=cyc%204&showspreadsheet=y, ComponentLink4Description="Packaging Specification", ComponentLink4URL=http://www.altera.com/literature/ds/dspkg.pdf, DatasheetVersion="ver1.2, Mar-2010", PackageDescription="144-Pin Plastic Enhanced Quad Flat Pack (EQFP144) - Wire Bond", PackageReference=EQFP144, PackageVersion="ver16.0, Dec-2009", Published=3-May-2010, Publisher="Altium Limited", Supplier 1=Digi-Key
U2: "FTDI FT230XS"
U3: "EPCS64 Series, In-system programmable 3.3V serial configuration device, 16-Pin SOIC, 64-Megabit, Industrial Grade, Pb-Free", Supplier Part Number 1=544-1380-5-ND, Code_IPC=SOIC127P1030-16, Code_JEDEC=MS-013-AA, ComponentLink1Description="Manufacturer Link", ComponentLink1URL=http://www.altera.com/products/devices/config/cfg-index.html, ComponentLink2Description="Configuration Handbook", ComponentLink2URL=http://www.altera.com/literature/hb/cfg/config_handbook.pdf, ComponentLink3Description="Pinout Specification", ComponentLink3URL=http://www.altera.com/literature/hb/cfg/config_handbook.pdf, ComponentLink4Description="Packaging Specification", ComponentLink4URL=http://www.altera.com/support/devices/packaging/specifications/pkg-pin/pdf/016-SOIC.pdf, Configures="Cyclone II, Stratix II, & Cyclone Devices", DatasheetVersion="ver2.0, Oct-2003", LatestRevisionDate=13-Apr-2006, LatestRevisionNote="IPC-7351 Footprint Added.", PackageDescription="16-Pin Small Outline Integrated Circuit Package (SOIC16)", PackageReference=SOIC16, PackageVersion="ver14.2, Oct-2005", Published=4-Mar-2005, Publisher="Altium Limited", Supplier 1=Digi-Key
U4: "Кварцевый генератор"
U5 U6: library part LD1086D2T, "st LD1086D2T"
U7: library part ADP3339, "ADP3339AKCZ-3.3-R7"
U8 U9 U10 U11 U12 U13 U14 U15: "DC Input Multi-Channel Half-Pitch  Phototransistor Optocoupler"

## Free pads (board coordinates)
  round 3.1 hole 3.1 unplated: 2(115.875,145.925) 2(115.875,224.725) 2(210.65,191.95) 2(256.475,145.925) 2(256.475,224.725)

## Via types
v1: diameter 1, hole 0.5, Top Layer to Bottom Layer, 71 vias
v2: diameter 1.27, hole 0.711, Top Layer to Bottom Layer, 42 vias

## Nets (pads, with @x,y where several pads share a name; then routed paths per layer and width w, separated by ;. In a path a pad name is that pad's centre, name@x,y a point inside that pad or via, vN(x,y) a via of type N, cw(c..) or ccw(c..) an arc to the next point about the centre after c; other vN are vias at no path point)
3V3_FTDI: C18.1 R10.1 R13.1 U2.3 U2.10 U2.11 | length 35.2
  Top Layer w0.3: v2(152.725,201.7) 152.725,202.575 153.9,203.75 C18.1@153.9,205.05 ; 153.35,201.45 U2.10@155.75,201.45 ; 153.825,201.325 154.335,200.815 U2.11@155.75,200.815
  Top Layer w0.381: U2.3@160.6,198.91 160.61,198.9 v2(162.475,198.9)
  Bottom Layer w0.381: R10.1@144.77,206.565 R13.1@148.02,206.565 152.91,206.565 153,206.655 153.425,206.23 153.425,204.35 ; v2(152.725,201.7) 152.725,203.65 153.425,204.35 ; v2(162.475,198.9) 158.875,198.9 153.425,204.35
+1.2: C20.1 C21.1 C26.1 C27.1 C28.1 C30.1 C32.1 C33.1 C37.1 C46.2 C48.2 U1.5 U1.29 U1.37 U1.45 U1.61 U1.78 U1.102 U1.109 U1.116 U1.134 U6.2 | length 139
  Top Layer w0.3: v2(184.7,179.675) 184.825,179.8 U1.37@186.575,179.8 ; U1.29@184.725,185.15 v1(187.225,185.15) ; U1.5@184.725,197.15 v1(187.475,197.15) ; v1(190.05,182.975) 190.575,182.45 U1.45@190.575,179.8 ; v1(191.575,198.55) U1.134@191.575,201 ; U1.61@198.575,179.8 v1(198.575,182.6) ; U1.116@200.575,201 200.575,203.025 201.25,203.7 v2(201.8,203.7) ; v1@202.35,196.2 202.4,196.15 v1(202.525,196.15) U1.102@205.925,196.15 ; v1(203.1,184.15) U1.78@205.925,184.15 ; U1.109@204.075,201 204.075,203.6 v2(204.1,203.625)
  Top Layer w0.5: v1(187.175,212.125) C26.1@187.175,214.625 187.9,215.35 U6.2@187.9,218.125
  Bottom Layer w0.25: C46.2@186.65,178.9 187.8,178.9 188.4,179.5 188.4,180.25 189.25,181.1 C27.1@190.05,181.1
  Bottom Layer w0.3: v2(184.7,179.675) 185.425,178.95 C46.2@186.6,178.95 ; C27.1@190.05,181.1 v1(190.05,182.975) ; v1(191.575,198.55) C37.1@191.575,200.1 ; C33.1@200.575,201.9 200.575,203.025 201.25,203.7 v2(201.8,203.7) ; v1(203.1,184.15) 204.8,184.15 C30.1@204.825,184.175 ; C48.2@204.1,201.8 v2(204.1,203.625)
  Bottom Layer w0.5: C21.1@185.625,185.15 v1(187.225,185.15) 187.875,185.15 v1(190.05,182.975) 191.125,184.05 197.125,184.05 v1(198.575,182.6) ; C20.1@185.65,197.475 187.225,197.475 v1@187.475,197.225 ; v1@187.125,212.2 191.95,207.375 193.2,207.375 195.825,204.75 ; v1@187.525,197.15 190.175,197.15 v1(191.575,198.55) ; v1@191.6,198.525 192.4,197.725 195.075,197.725 195.825,198.475 195.825,204.75 ; C28.1@198.575,180.7 v1(198.575,182.6) ; v2@201.25,203.7 196.875,203.7 195.825,204.75 ; v2(201.8,203.7) 203.525,203.7 203.775,203.95 v2(204.1,203.625) 205.125,203.625 206.475,202.275 206.475,199.05 205.025,197.6 C32.1@205.025,196.15 v1(202.525,196.15) ; v1@202.475,196.25 202.025,196.25 199.075,193.3 199.075,188.025 v1@202.95,184.15 ; v1(203.1,184.15) v1@202.95,184.15 ; v1(198.575,182.6) 198.575,183.25 199.475,184.15 v1@202.95,184.15
+2.5: C5.1 C45.2 C47.2 U1.35 U1.107 U5.2 | length 64.4
  Top Layer w0.3: U1.35@184.725,182.15 186.1,182.15 v1(187.1,183.15) 190.05,186.1 190.05,191.475 193.275,194.7 199.325,194.7 199.7,195.075 ; 199.75,195.125 199.7,195.075 ; U1.107@205.625,198.65 202.275,198.65 199.7,196.075 199.7,195.075 ; U1.107@205.925,198.65 208.2,198.65 C47.2@208.825,199.275
  Top Layer w0.5: U5.2@204.75,218.125 204.75,215.225 C5.1@204.075,214.55 204.075,211.5 206.125,209.45 212.425,209.45 213,208.875 ; C47.2@208.675,199.425 208.675,201.475 213.05,205.85 213.05,208.85 213.013,208.887
  Bottom Layer w0.5: C45.2@185.625,183.15 v1(187.1,183.15)
+3.3: ACT_D1.1 ACT_D2.1 ACT_D3.1 ACT_D4.1 ACT_D5.1 ACT_D6.1 ACT_D7.1 ACT_D8.1 ACT_D9.1 ACT_D10.1 ACT_n_D1.1 ACT_n_D2.1 ACT_n_D3.1 ACT_n_D4.1 ACT_n_D5.1 ACT_n_D6.1 ACT_n_D7.1 ACT_n_D8.1 ACT_n_D9.1 ACT_n_D10.1 C19.2 C22.2 C24.1 C29.2 C31.2 C36.2 C38.2 C39.2 C40.2 C41.2 C42.2 C43.2 C44.2 JTAG.4 LD1.1 R3.1 R4.1 R5.1 R9_D1.1 R9_D2.1 R9_D3.1 R9_D4.1 R9_D5.1 R9_D6.1 R9_D7.1 R9_D8.1 R9_D9.1 R9_D10.1 R12.2 T_D1.1 T_D2.1 T_D3.1 T_D4.1 T_D5.1 T_D6.1 T_D7.1 T_D8.1 T_D9.1 T_D10.1 T_n_D1.1 T_n_D2.1 T_n_D3.1 T_n_D4.1 T_n_D5.1 T_n_D6.1 T_n_D7.1 T_n_D8.1 T_n_D9.1 T_n_D10.1 U1.17 U1.26 U1.40 U1.47 U1.56 U1.62 U1.81 U1.93 U1.96 U1.117 U1.122 U1.130 U1.139 U3.1 U3.2 U3.9 U4.4 U7.2 | length 742.1
  Top Layer w0.25: U1.17@184.425,191.175 184.45,191.15 v1(187.45,191.15)
  Top Layer w0.3: R9_D8.1@169.45,173.95 v1(169.45,175.3) ; R9_D7.1@172.075,173.95 172.075,175.35 v1(172.125,175.3) ; v1(174.9,175.3) 174.925,175.275 R9_D6.1@174.925,173.95 ; R9_D5.1@177.6,173.95 v1(177.6,175.325) ; U1.26@184.725,186.65 186.825,186.65 v1@187.325,187.15 ; U1.40@188.075,179.875 188.075,181.95 v1(188.25,182.125) ; v1(189.075,198.575) U1.139@189.075,201 ; U1.47@191.575,179.8 191.575,181.7 v1@192.35,182.475 ; U1.130@193.575,201 193.575,202.4 193.684,202.509 v2(193.684,203.36) ; U1.56@196.075,179.8 v1(196.075,182.625) ; C42.2@197.275,204.2 197.35,204.275 C42.2@197.425,204.275 ; U1.122@197.575,201 197.575,204.125 C42.2@197.425,204.275 ; U1.62@199.075,179.8 199.075,181.85 199.7,182.475 v1(200.75,182.475) ; C41.2@199.625,204.275 C42.2@197.425,204.275 ; C41.2@199.725,204.175 200.075,203.825 U1.117@200.075,201 ; v1(202.575,191.65) U1.93@205.925,191.65 ; v1(203.35,193.65) 203.85,193.15 U1.96@205.925,193.15 ; U1.81@205.925,185.65 207.925,185.65 208.384,186.109 v2(208.51,186.109)
  Top Layer w0.5: ACT_n_D9.1@126.8,186.65 127,186.45 ACT_D9.1@129.45,186.45 ; T_n_D9.1@126.8,189.1 129.425,189.1 T_D9.1@129.45,189.125 ; ACT_D8.1@129.45,163.075 126.875,163.075 ACT_n_D8.1@126.8,163.15 T_n_D8.1@126.8,165.4 126.85,165.45 T_D8.1@129.45,165.45 ; ACT_D10.1@129.45,209.925 129.2,210.175 ACT_n_D10.1@126.8,210.175 T_n_D10.1@126.8,212.5 129.425,212.5 T_D10.1@129.45,212.525 ; ACT_n_D7.1@141.325,156 ACT_D7.1@141.325,158.425 ; T_n_D7.1@143.425,156 T_D7.1@143.425,158.375 ; R9_D9.1@146.25,187.7 v1(147.55,187.7) ; R9_D10.1@146.25,190.35 v1(147.65,190.35) ; U3.2@169.075,202.9 v1@172.3,202.9 ; U3.1@169.1,204.2 171.275,204.2 v1@172.325,203.15 ; v1(170.4,187.225) 172.375,187.225 U4.4@172.6,187 ; ACT_D6.1@171.025,158.45 171.1,158.375 ACT_n_D6.1@171.1,156 ; T_n_D6.1@173.425,156 173.725,156.3 T_D6.1@173.725,158.45 ; v1(175.97,195.28) U3.9@178.275,195.28 ; v1@187.325,195.075 189.075,196.825 v1(189.075,198.575) ; v1@192.35,182.475 v1@192.35,182.5 ; v1(192.375,182.5) 192.375,183.75 194.65,186.025 v1@196.05,186.025 ; v2@193.575,203.2 193.575,207.275 195.7,209.4 195.7,211.15 ; v1(196.05,186.1) 198.4,186.1 202.575,190.275 v1(202.575,191.65) ; v1(196.075,182.625) 196,182.7 v1@196.05,182.75 ; v1@196.1,186.025 v1@196.05,186.025 ; U7.2@196.4,218.125 196.4,215.325 C24.1@195.7,214.625 195.7,211.15 ; v1(199.175,209.575) 197.275,209.575 195.7,211.15 ; C41.2@199.7,204.175 199.725,204.175 200.575,204.175 201.65,205.25 v1(202.7,205.25) ; ACT_n_D5.1@200.75,156.25 ACT_D5.1@200.75,158.45 T_D5.1@203.35,158.45 ; v1(200.75,182.475) 199.175,184.05 197.35,184.05 v1@196.05,182.75 ; ACT_n_D5.1@200.85,155.925 200.925,156 ACT_n_D5.1@201,156 T_n_D5.1@203.325,156 ; v1@202.575,205.275 209.3,205.275 210.375,206.35 LD1.1@210.375,207.625 ; T_n_D5.1@203.425,155.95 203.425,155.7 204.6,154.525 229.425,154.525 230.7,155.8 ACT_n_D4.1@230.7,156 230.55,156.15 ACT_D4.1@230.55,158.45 ; v1(207.6,170.125) 207.775,169.95 R12.2@207.775,168.45 ; v1@223.4,208.8 224.425,207.775 R9_D1.1@225.725,207.775 ; v1(224.075,199.375) 224.6,199.9 R9_D4.1@225.8,199.9 ; v1(224.375,205.075) 225.675,205.075 R9_D2.1@225.825,205.225 ; v1(224.4,202.35) 224.45,202.4 R9_D3.1@225.525,202.4 ; ACT_n_D4.1@230.775,155.9 230.875,156 T_n_D4.1@233.05,156 233.05,158.275 T_D4.1@233.225,158.45 ; T_n_D4.1@232.85,155.975 234.25,154.575 241.2,154.575 246.275,159.65 ; ACT_D3.1@242.05,163.275 242.325,163.55 ACT_n_D3.1@244.725,163.55 ; T_D3.1@242.05,165.525 242.1,165.575 T_n_D3.1@244.7,165.575 244.725,165.55 ACT_n_D3.1@244.725,163.55 ; ACT_D2.1@242.05,186.8 242.1,186.85 ACT_n_D2.1@244.7,186.85 244.7,188.9 T_n_D2.1@244.725,188.925 242.175,188.925 T_D2.1@242.05,189.05 ; ACT_D1.1@242.05,209.925 244.45,209.925 ACT_n_D1.1@244.65,210.125 ; T_D1.1@242.15,212.6 T_D1.1@242.05,212.7 244.55,212.7 T_n_D1.1@244.65,212.6 ; 246.275,159.525 246.275,159.65 ; v1@196.05,182.75 v1@196.05,186.025 ; ACT_n_D3.1@244.725,163.55 245.4,163.55 246.275,162.675 246.275,159.65
  Bottom Layer w0.25: 186.55,190.25 v1(187.45,191.15)
  Bottom Layer w0.3: C36.2@185.85,190.25 186.55,190.25 ; v1(189.075,198.575) C44.2@189.075,200.1 ; C31.2@192.325,181.125 192.375,181.175 v1(192.375,182.5) ; C43.2@193.575,201.9 193.575,203.25 v2(193.684,203.36) ; C22.2@196.075,180.75 v1(196.075,182.625) ; C38.2@200.75,180.675 v1(200.75,182.475) ; C40.2@204.125,191.65 v1(202.575,191.65) 202.575,192.825 203.4,193.65 C29.2@205.025,193.65 ; C39.2@206.916,186.109 v2(208.51,186.109)
  Bottom Layer w0.5: ACT_n_D9.1@126.775,186.825 ACT_n_D9.1@126.8,186.8 ; ACT_n_D8.1@126.8,163.15 126.45,163.15 124.9,161.6 124.9,158.4 128.825,154.475 140.4,154.475 141.3,155.375 ACT_n_D7.1@141.3,156.15 ; T_n_D8.1@126.8,165.4 125.375,166.825 125.375,177.575 129.025,181.225 129.025,184.575 ACT_n_D9.1@127.075,186.525 ; ACT_n_D10.1@126.8,210.175 131.175,210.175 146.75,194.6 ; T_n_D9.1@126.825,189.25 126.8,189.225 T_n_D9.1@126.8,189.1 ACT_n_D9.1@126.8,186.8 ; ACT_n_D7.1@141.325,156 T_n_D7.1@143.35,156 ; T_n_D7.1@143.35,155.95 T_n_D7.1@143.35,156 ; T_n_D7.1@143.412,156.012 T_n_D7.1@143.45,156.05 ; 146.75,194.675 147.65,193.775 147.65,191.925 147.55,191.825 v1@147.55,190.475 ; 147.325,158.575 148.475,158.575 153.575,163.675 153.575,168.6 144.825,177.35 144.825,183.05 147.55,185.775 v1(147.55,187.7) 145.675,185.825 131.825,185.825 131.125,186.525 ACT_n_D9.1@127.075,186.525 ; 147.325,158.6 144.175,158.6 143.35,157.775 T_n_D7.1@143.35,156 ; v1@147.6,187.65 153.315,181.935 JTAG.4@159.255,181.935 ; v1@147.65,187.725 v1@147.65,190.25 ; v1(147.65,190.35) v1@147.65,190.25 ; 155.025,195.375 152.775,195.375 v1@147.65,190.25 ; 155.025,195.475 164.9,195.475 v1(172.575,203.15) ; v1(169.45,175.3) 170.958,173.792 170.958,170.14 170.9,170.082 170.9,157.9 171,157.8 ACT_n_D6.1@171,156 ; v1@169.487,175.587 170.4,176.5 v1(170.4,187.225) 172.27,187.225 175.97,190.925 v1(175.97,195.28) 172.65,198.6 172.65,203.225 175.125,205.7 191.344,205.7 v2@193.544,203.5 ; v1@169.6,175.3 v1(172.125,175.3) ; ACT_n_D6.1@171.1,156 T_n_D6.1@173.425,156 ; v1@172.375,175.3 v1(174.9,175.3) v1@177.675,175.3 ; v1(177.6,175.325) 184.4,182.125 v1(188.25,182.125) ; C19.2@185.6,187.2 v1(187.25,187.2) ; R5.1@185.7,195.025 185.825,195.15 v1@187.375,195.15 ; R4.1@185.9,192.675 185.975,192.6 187.325,192.6 ; v1@187.25,190.825 v1(187.25,187.2) ; v1@187.325,195.1 187.325,192.6 ; v1(187.45,191.15) 187.45,192.475 187.325,192.6 ; C44.2@189.075,200.1 189.7,200.1 190.35,200.75 190.35,202.675 191.175,203.5 v2@193.544,203.5 ; v2@193.622,203.422 v2(193.684,203.36) ; v2@193.7,203.5 v2@193.544,203.5 ; v1(196.05,186.1) 196.05,186.125 192.275,186.125 191.2,187.2 v1(187.25,187.2) ; v1(199.175,209.575) 201.65,207.1 201.65,206.3 v1(202.7,205.25) 214.425,205.25 217.775,208.6 v1(223.425,208.6) ; C38.2@200.75,180.675 202.1,180.675 ; 202.1,180.625 202.4,180.625 ; R3.1@204.925,188.75 R3.1@204.925,188.65 204.925,188.35 206.7,186.575 C39.2@206.7,186.125 ; v1(207.6,170.125) 207.6,175.425 202.4,180.625 ; v2(208.51,186.109) 208.775,185.844 208.775,182.725 206.675,180.625 202.4,180.625 ; v1(224.075,199.375) 224.4,199.7 v1(224.4,202.35) 224.375,202.375 v1(224.375,205.075) 223.425,206.025 v1(223.425,208.6) ; ACT_n_D1.1@244.675,210.175 244.675,212.65 T_n_D1.1@244.75,212.725 ; T_n_D2.1@244.725,188.925 244.725,186.875 ACT_n_D2.1@244.7,186.85 245.8,186.85 246.375,186.275 246.375,166.65 245.225,165.5 T_n_D3.1@244.8,165.5 ; T_n_D2.1@244.825,188.85 246.375,190.4 246.375,192.475 245.4,193.45 240.9,193.45 237.15,197.2 237.15,201 229.55,208.6 v1(223.425,208.6) ; ACT_n_D1.1@244.825,209.95 244.6,210.175 225,210.175 v1(223.425,208.6) ; ACT_n_D9.1@126.8,186.8 ACT_n_D9.1@127.075,186.525
  other v1: 187.425,195.1
+5: C1.1 C2.1 C3.1 C4.1 C23.1 C25.1 CN1.1 R16.2 U2.12 U5.3 U6.3 U7.3 | length 126.3
  Top Layer w0.3: 154.36,213.065 152.275,213.065 150.475,211.265 150.475,201.278 151.573,200.18 U2.12@155.75,200.18
  Top Layer w0.5: CN1.1@156.27,213.065 154.36,213.065 153.45,213.975 153.45,215.775 162.375,224.7 171.85,224.7 174.575,221.975 C1.1@175.45,221.975 ; C1.1@175.475,221.975 C1.1@175.45,221.975 ; C3.1@179.9,222.025 182.025,222.025 183.025,221.025 186.525,221.025 ; C3.1@179.975,221.975 C2.1@177.725,221.975 177.125,221.975 177.1,222 175.475,222 C1.1@175.45,221.975 ; 186.525,221.05 189.175,221.05 ; C25.1@190.425,214.725 190.2,214.95 U6.3@190.2,218.125 190.2,220.025 189.175,221.05 ; C23.1@198.95,214.7 198.7,214.95 U7.3@198.7,218.125 198.7,219.9 197.55,221.05 ; C4.1@207.3,214.575 207.05,214.825 U5.3@207.05,218.125 207.05,220.375 206.375,221.05 197.55,221.05 ; 189.175,221.05 197.55,221.05
  Bottom Layer w0.5: CN1.1@156.27,213.065 154.27,213.065 153.52,213.815 153.52,215.065 155.27,216.815 156.99,216.815 160.7,220.525 R16.2@168.975,220.525
+12: CN3.3 CN3.4 Dr_D1.1 Dr_D1.3 Dr_D2.1 Dr_D2.3 Dr_D3.1 Dr_D3.3 Dr_D4.1 Dr_D4.3 Dr_D5.1 Dr_D5.3 Dr_D6.1 Dr_D6.3 Dr_D7.1 Dr_D7.3 Dr_D8.1 Dr_D8.3 Dr_D9.1 Dr_D9.3 Dr_D10.1 Dr_D10.3 R8.2 Tm_D1.3 Tm_D2.3 Tm_D3.3 Tm_D4.3 Tm_D5.3 Tm_D6.3 Tm_D7.3 Tm_D8.3 Tm_D9.3 Tm_D10.3 U8.1 U8.3 U8.5 U8.7 U9.1 U9.3 U9.5 U9.7 U10.1 U10.3 U10.5 U10.7 | length 451.2
  Top Layer w0.25: Tm_D9.3@122.725,195.525 Tm_D9.3@122.75,195.5 ; Tm_D10.3@122.875,219.1 Tm_D10.3@122.9,219.075 ; Tm_D6.3@174.9,152.25 174.95,152.25 Tm_D6.3@174.975,152.275 ; Dr_D5.3@194.475,151.725 Dr_D5.3@194.475,152.2 Dr_D5.3@194.475,152.25 ; Dr_D5.1@199.45,152.225 Dr_D5.1@199.475,152.25 ; Tm_D5.3@204.825,152.25 Tm_D5.3@204.85,152.275 ; Dr_D3.3@249.2,156.6 Dr_D3.3@249.45,156.6
  Top Layer w0.5: 122.375,187.875 122.362,187.862 ; Dr_D10.1@122.75,201.3 Tm_D9.3@122.75,195.575 121.05,193.875 121.05,189.075 122.263,187.862 122.362,187.862 ; Dr_D10.1@122.775,201.325 120.975,203.125 120.975,204.525 Dr_D10.3@122.75,206.3 120.875,208.175 120.875,217.375 Tm_D10.3@122.85,219.35 ; U10.3@135.75,187.625 U10.3@135.925,187.625 ; U10.3@135.925,187.73 137.545,187.73 137.637,187.637 ; U10.1@135.925,190.27 137.63,190.27 138.15,189.75 138.15,188.15 137.637,187.637 ; U10.5@136.075,185.225 137.775,185.225 138.175,185.625 138.175,187.1 137.637,187.637 ; U10.7@136.25,182.75 137.225,182.75 137.95,183.475 137.95,184.95 137.71,185.19 U10.5@135.925,185.19 133.635,185.19 130.963,187.862 122.362,187.862 ; Tm_D7.3@145.075,152.2 Dr_D7.1@139.725,152.2 137.925,150.4 136.525,150.4 Dr_D7.3@134.725,152.2 132.375,149.85 124.925,149.85 122.75,152.025 Dr_D8.1@122.75,154.1 120.95,155.9 120.95,157.3 Dr_D8.3@122.75,159.1 120.45,161.4 120.45,169.675 Tm_D8.3@122.75,171.975 Dr_D9.1@122.75,177.7 120.825,179.625 120.825,180.825 122.75,182.75 120.875,184.625 120.875,186.375 122.362,187.862 ; Tm_D7.3@145.1,152.2 147.575,149.725 155.725,149.725 160.325,154.325 162.475,154.325 Dr_D6.3@164.6,152.2 165.963,153.562 168.588,153.562 169.6,152.55 Dr_D6.1@169.6,152.2 170.625,152.2 172.5,154.075 ; U9.1@168.73,163.85 168.73,165.33 169.425,166.025 170.6,166.025 171.287,165.338 ; U9.3@171.27,163.85 171.27,165.32 171.287,165.338 ; U9.5@173.75,163.775 173.75,165.35 173.15,165.95 171.9,165.95 171.287,165.338 ; Tm_D6.3@174.75,152.225 174.225,152.225 172.5,153.95 172.5,154.075 ; U9.7@176.3,163.875 176.3,165.475 175.7,166.075 174.6,166.075 173.81,165.285 U9.5@173.81,163.85 173.81,161.235 172.5,159.925 172.5,154.075 ; Dr_D5.3@194.475,151.725 195.875,150.325 197.6,150.325 Dr_D5.1@199.475,152.2 ; Dr_D5.1@199.475,152.25 199.525,152.2 Tm_D5.3@204.85,152.2 204.85,151.85 207.25,149.45 221.6,149.45 Dr_D4.3@224.35,152.2 226.087,150.463 227.613,150.463 Dr_D4.1@229.35,152.2 Tm_D4.3@234.65,152.2 ; CN3.3@233.875,216.75 233.875,216.975 v2(236.75,219.85) ; CN3.4@233.875,222.85 233.875,222.725 v2(236.75,219.85) ; Tm_D4.3@234.725,152.2 234.725,150.35 237.15,147.925 247.425,147.925 250.925,151.425 250.925,154.875 Dr_D3.3@249.2,156.6 ; U8.7@235.575,207.575 U8.7@235.9,207.575 ; U8.3@235.6,202.575 234.225,202.575 233.7,203.1 233.7,204.6 234.21,205.11 U8.5@235.9,205.11 ; U8.1@235.65,200.05 234.35,200.05 233.675,200.725 233.675,201.825 234.42,202.57 U8.3@235.9,202.57 ; U8.5@235.725,205.15 234.35,205.15 233.75,205.75 233.75,207.025 234.375,207.65 U8.7@235.9,207.65 239.25,207.65 240.45,208.85 240.45,210.65 241.175,211.375 244.161,211.375 244.173,211.387 246.412,211.387 Tm_D1.3@249.2,214.175 ; Dr_D2.3@249.2,180.2 Dr_D2.3@249.475,180.2 ; Dr_D2.1@249.2,185.2 Dr_D2.1@249.2,185.4 ; Tm_D2.3@249.2,190.55 Dr_D2.1@249.2,185.4 ; Tm_D2.3@249.2,190.575 249.725,190.575 251.95,192.8 251.95,202.075 250.225,203.8 Dr_D1.3@249.2,203.8 251.25,205.85 251.25,206.75 Dr_D1.1@249.2,208.8 Tm_D1.3@249.2,214.175 ; Dr_D3.3@249.45,156.6 249.725,156.6 251.15,158.025 251.15,159.65 Dr_D3.1@249.2,161.6 Tm_D3.3@249.2,166.975 249.975,166.975 251.825,168.825 251.825,177.85 Dr_D2.3@249.475,180.2 ; v2(236.75,219.85) 244.75,219.85 247.625,216.975 247.625,215.45 248.9,214.175 Tm_D1.3@249.2,214.175 ; Dr_D2.1@249.2,185.4 251.125,183.475 251.125,181.6 249.725,180.2 Dr_D2.3@249.475,180.2
  Bottom Layer w0.5: Dr_D6.3@164.6,152.2 164.6,151.55 166.2,149.95 167.35,149.95 Dr_D6.1@169.6,152.2 Tm_D6.3@174.975,152.2 177.125,150.05 192.325,150.05 Dr_D5.3@194.475,152.2 ; R8.2@219.4,219.15 220.025,219.775 236.675,219.775 v2(236.75,219.85)
ASDO: R7.2 U1.6 U3.15 | length 11.6
  Top Layer w0.25: U3.15@178.275,202.9 179.875,202.9 180.212,202.563 180.212,201.588 180.875,200.925 R7.2@181.775,200.925 R7.2@181.775,200.775 ; R7.2@181.825,200.775 181.8,200.75 181.8,197.425 182.575,196.65 U1.6@184.725,196.65